# Altium PCB Bucaneve_single_board.PcbDoc (part 1 of 2)
Units mm, origin at the board's own origin, x right, y up, seen from the top; angles counter-clockwise.
Board outline 64 x 64 mm, 4 copper layers (Top Layer, Mid-Layer 1, Mid-Layer 2, Bottom Layer), stack 2.772 mm thick; 84 components, 52 nets, 236 pads, 132 vias.
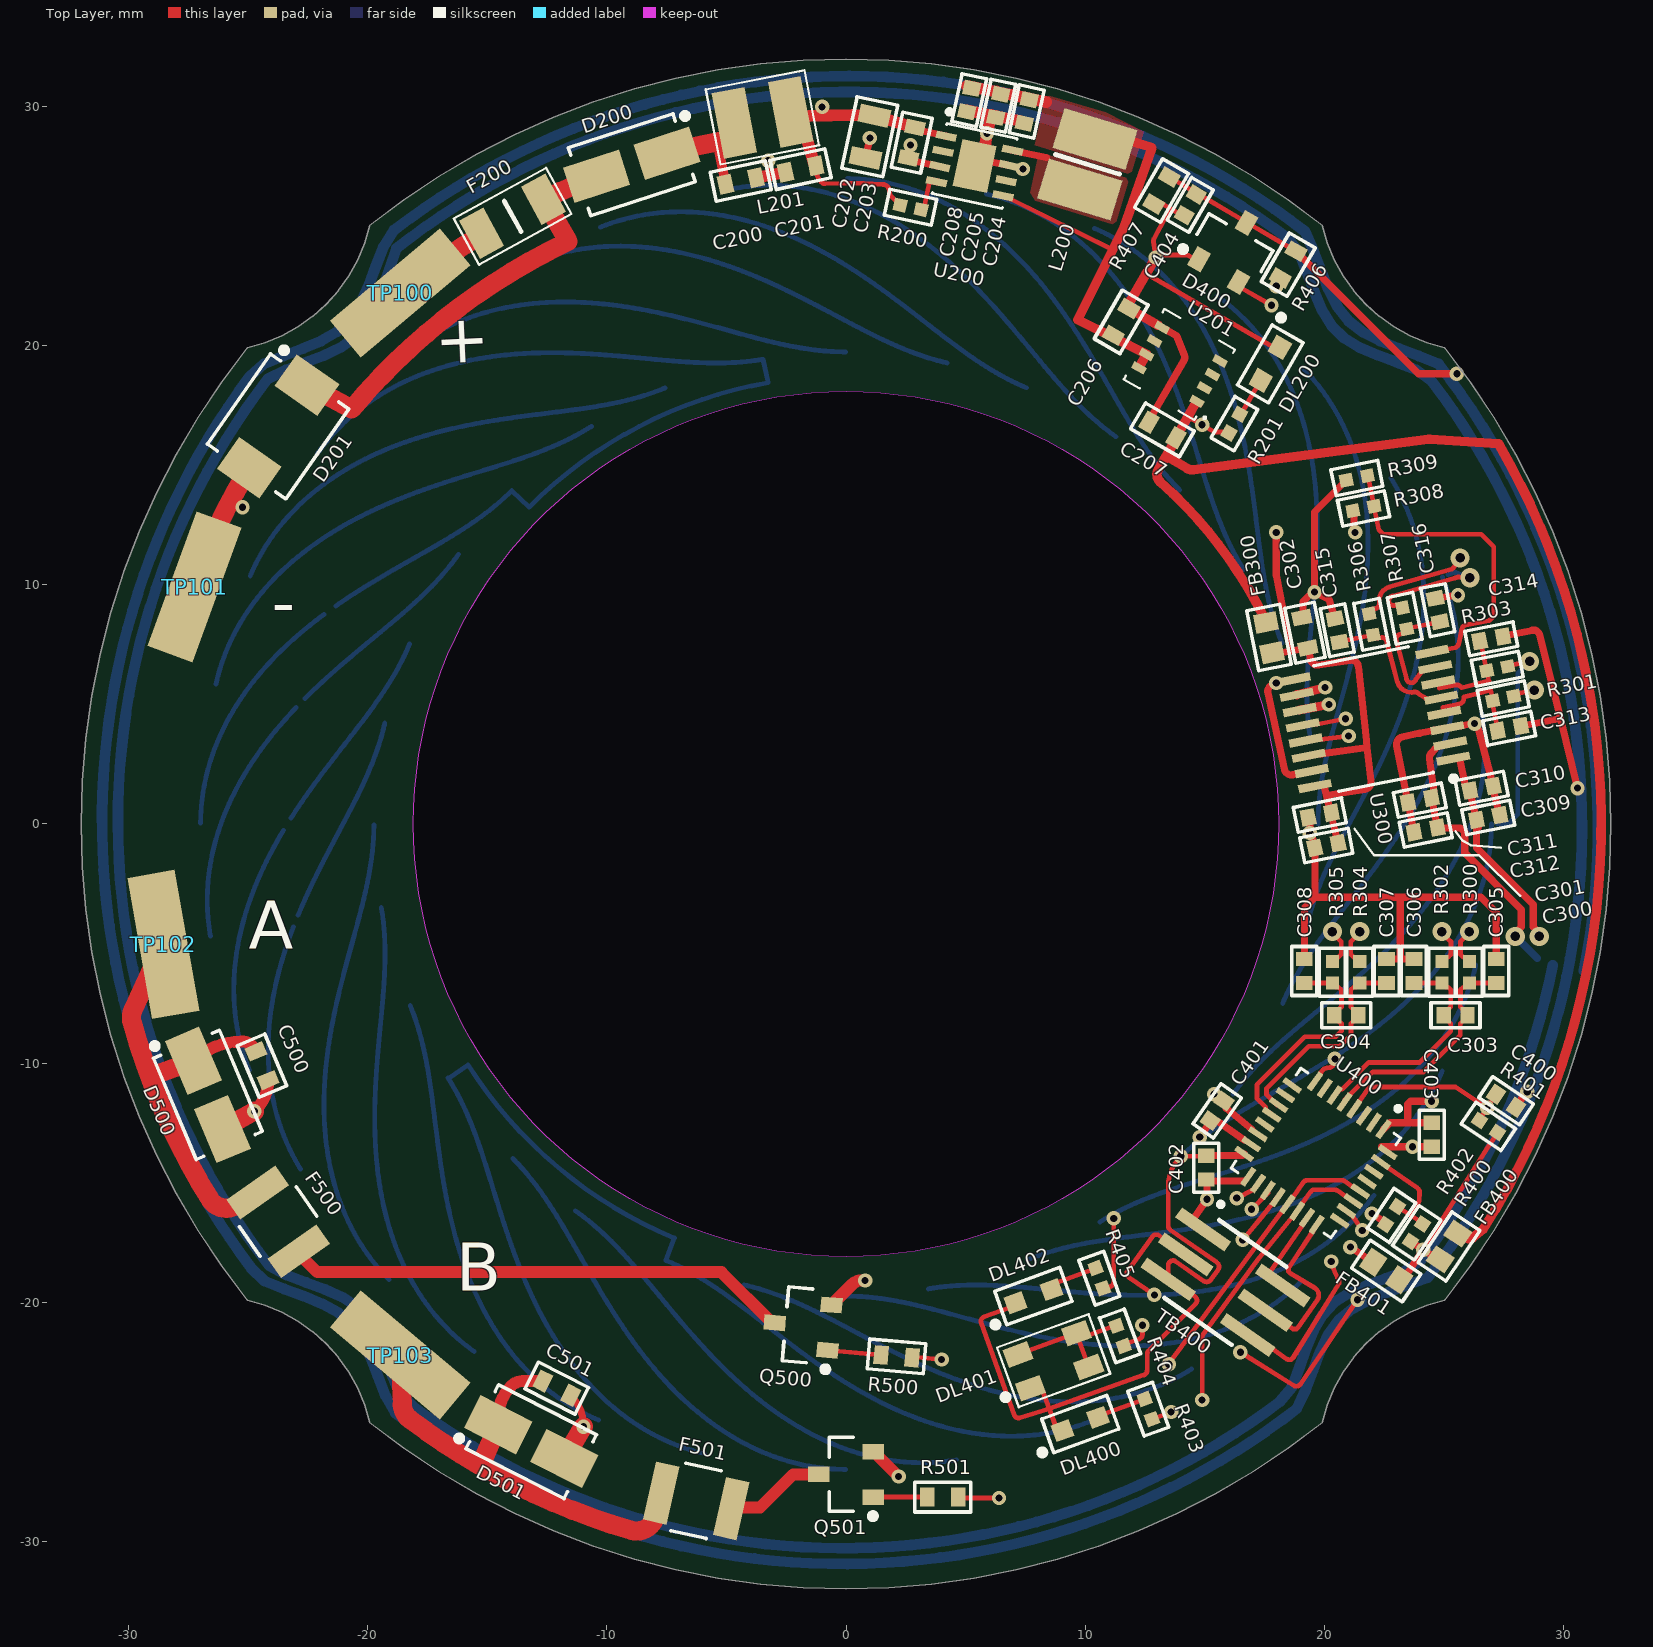
[diagram p0: Top Layer view]
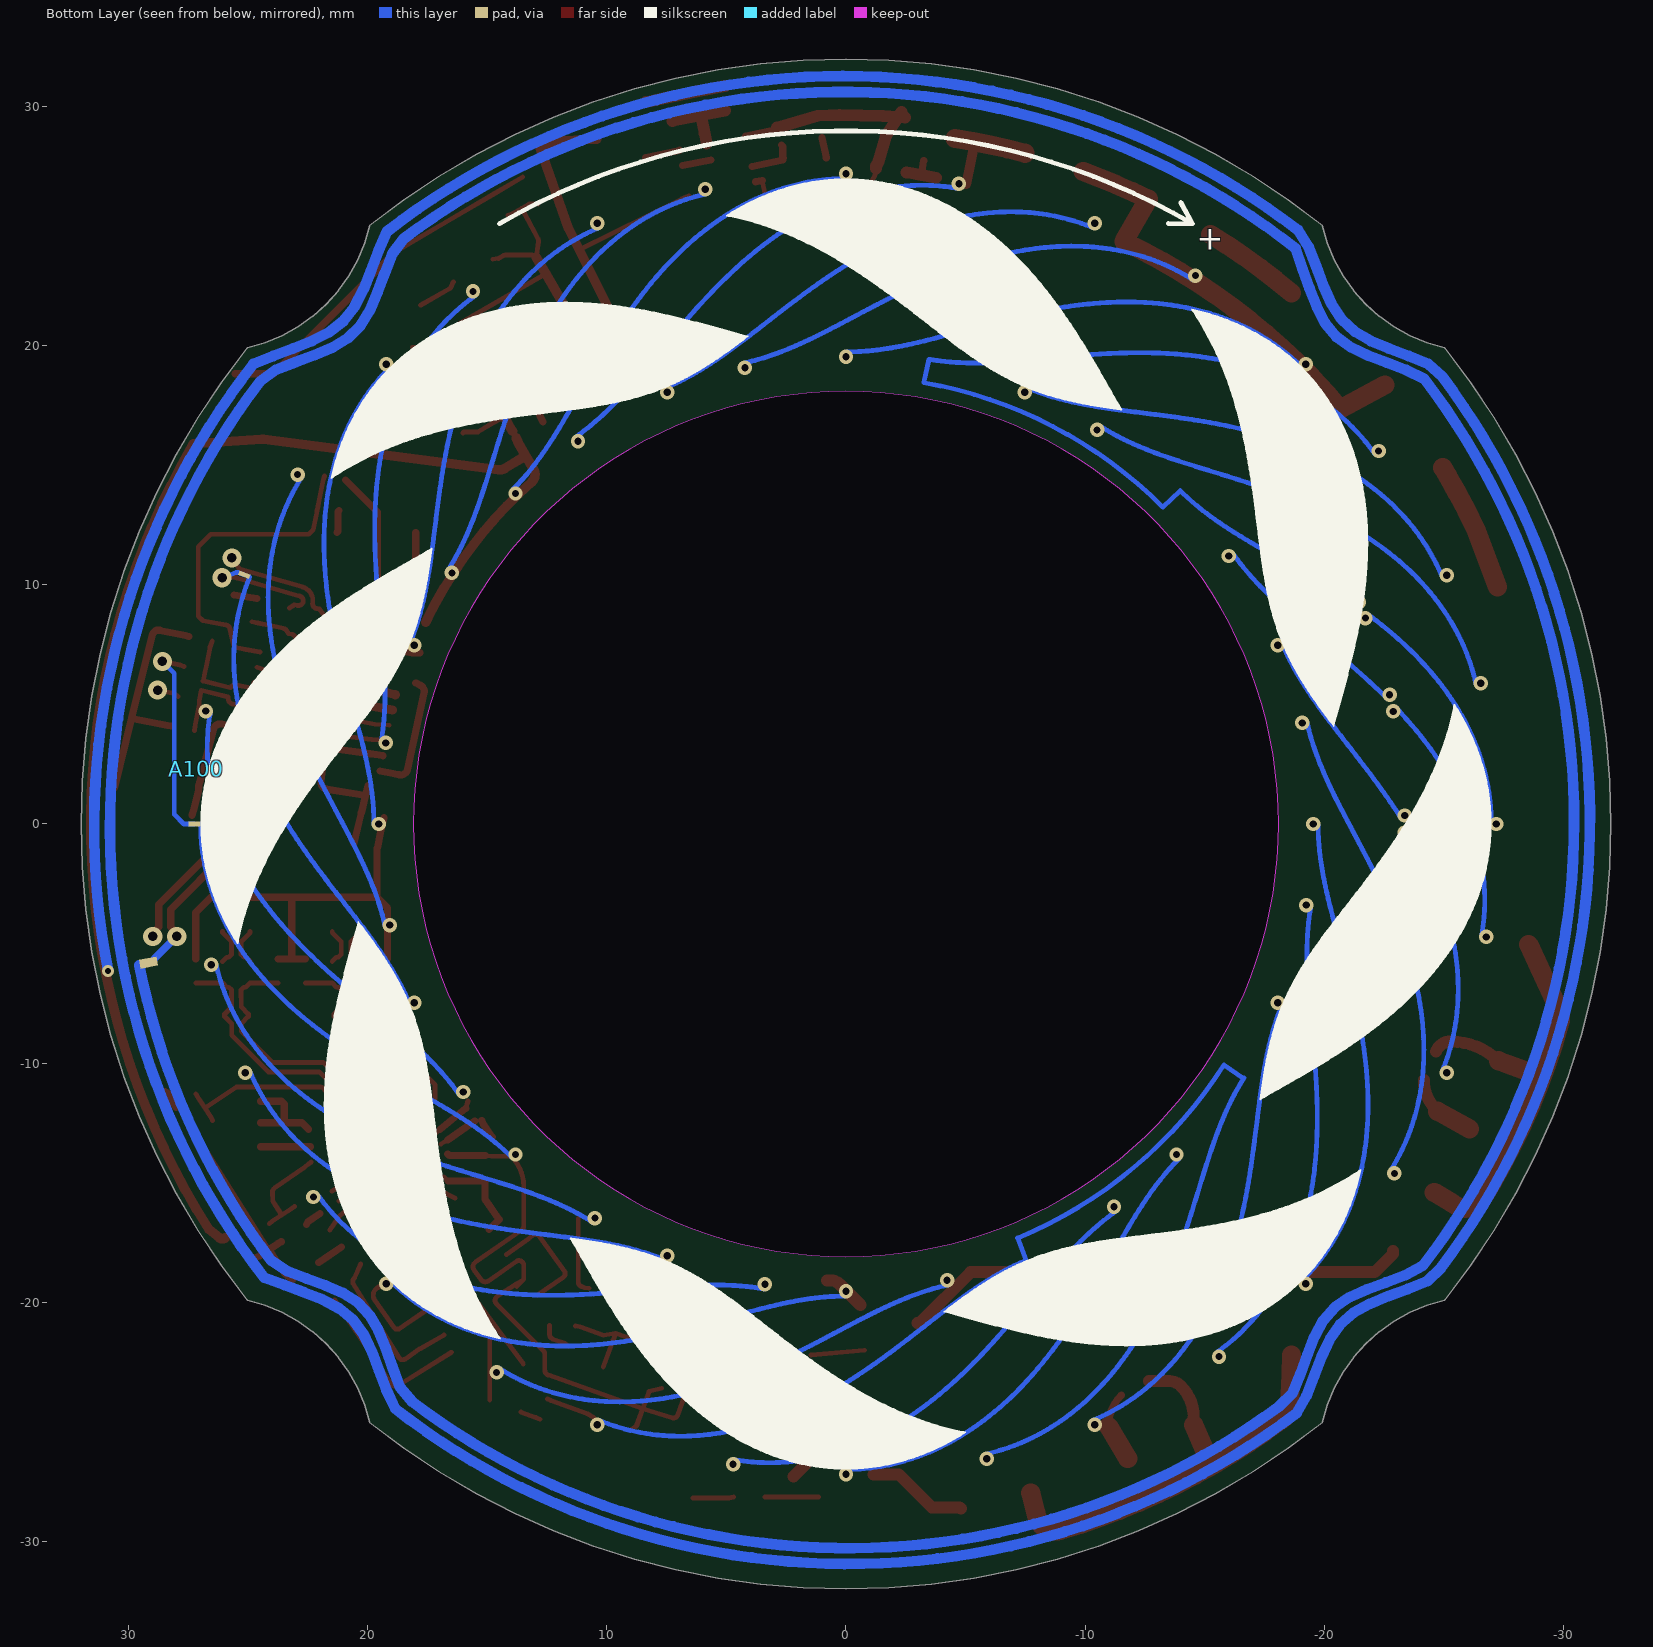
[diagram p1: Bottom Layer view, seen from below]
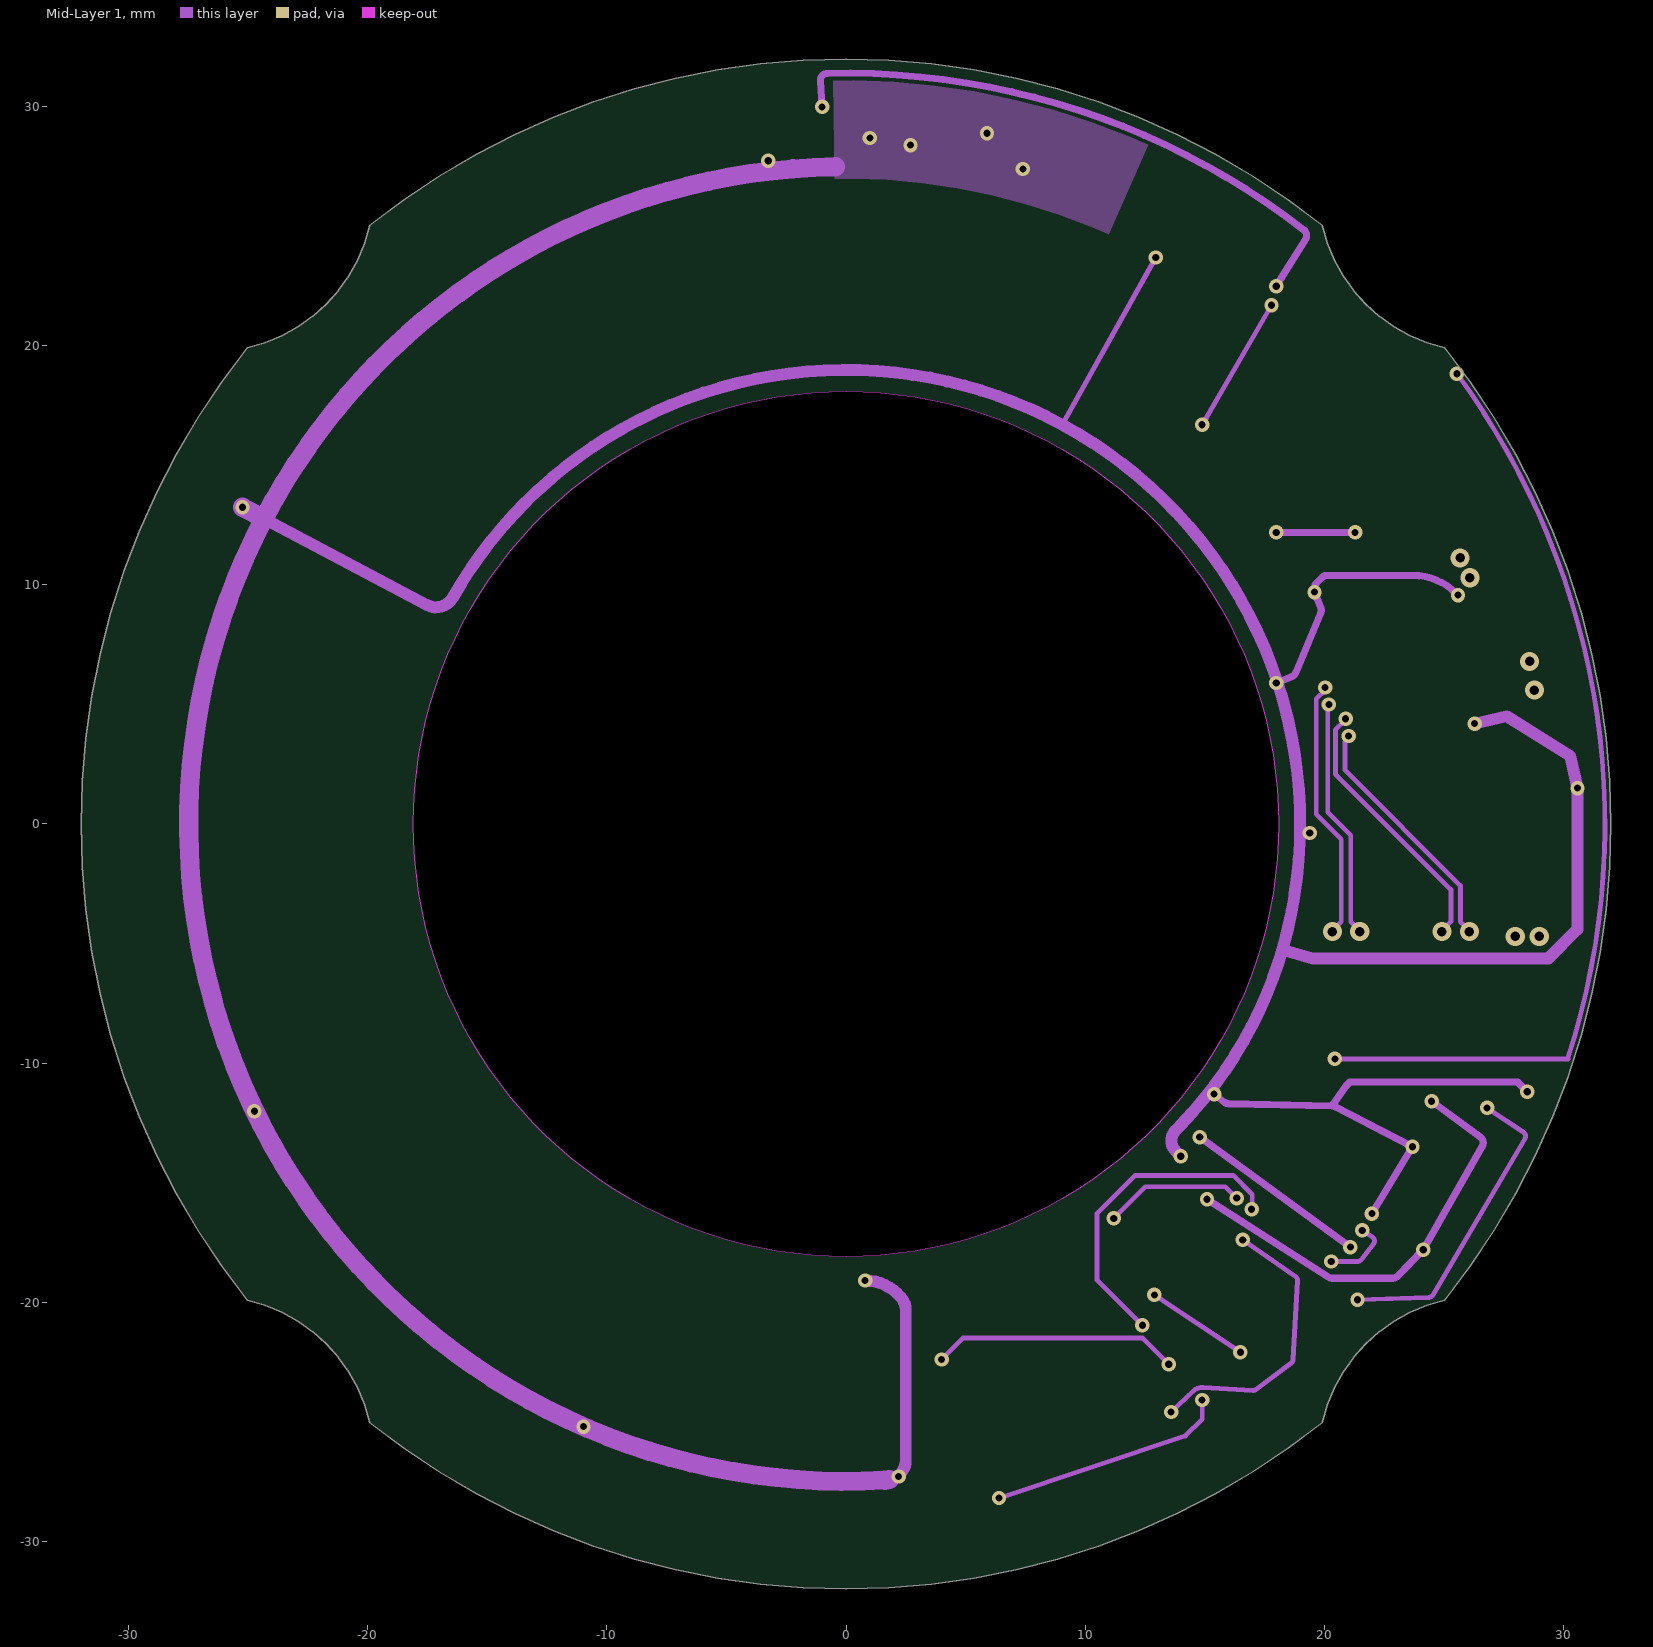
[diagram p2: Mid-Layer 1]
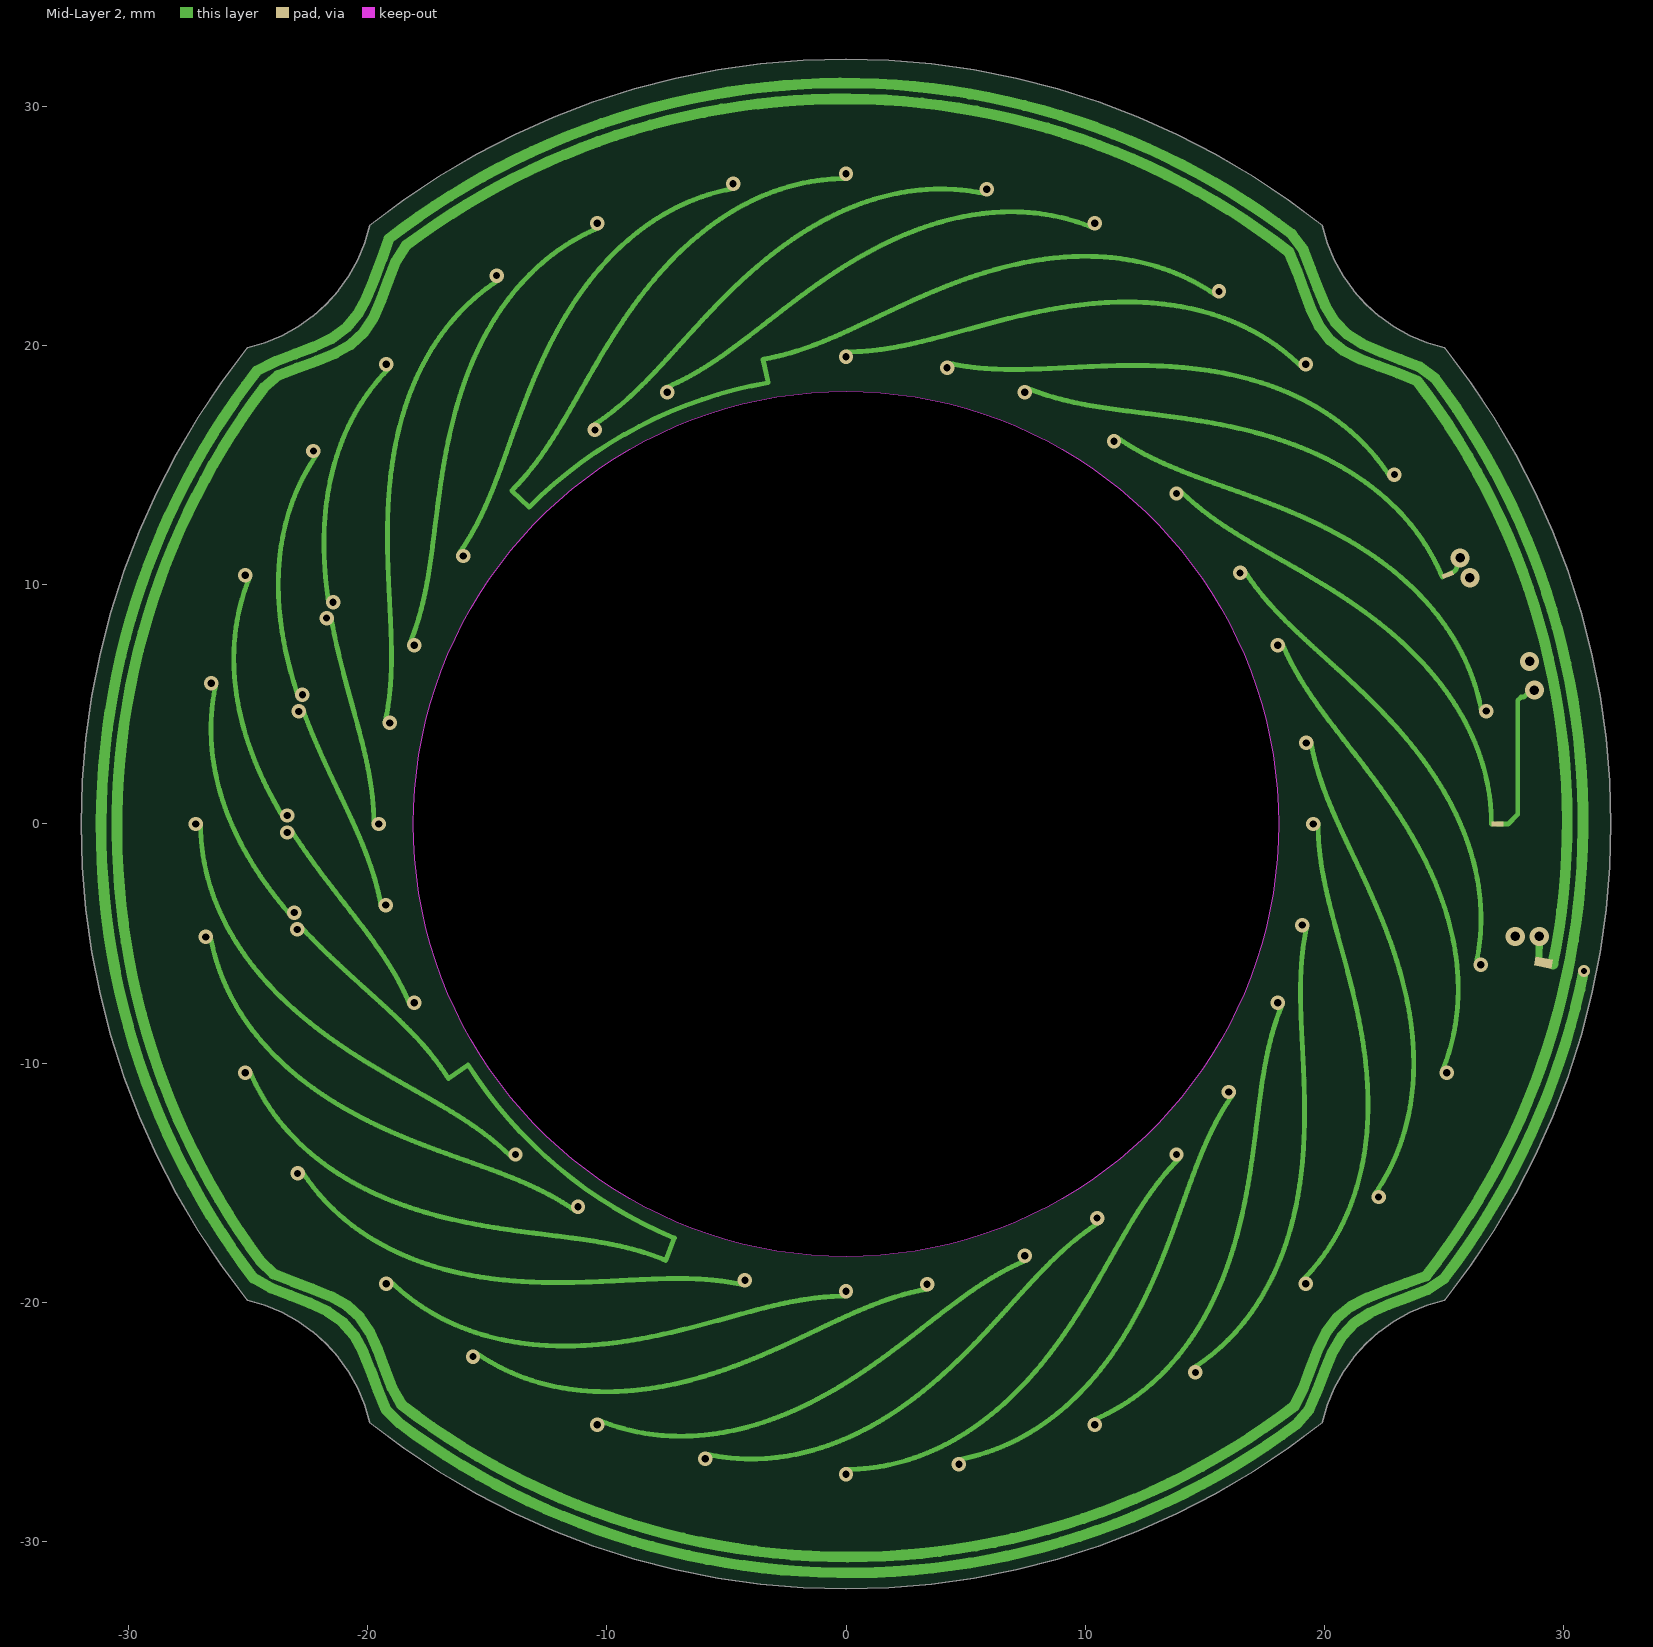
[diagram p3: Mid-Layer 2]

## Layer stack, top to bottom
Top Solder: solder mask 0.0102, Solder Resist, Dk 3.5
Top Layer: signal copper 0.0356
Dielectric 1: dielectric 0.115, FR-4, Dk 4.8
Mid-Layer 1: signal copper 0.035
Dielectric 2: prepreg 2.4, PP-006, Dk 4.1
Mid-Layer 2: signal copper 0.0356
Dielectric2: dielectric 0.115, FR-4, Dk 4.8
Bottom Layer: signal copper 0.0356
Bottom Solder: solder mask 0.0102, Solder Resist, Dk 3.5

## Board outline
-25.035,-19.931 -26.112,-18.498 -27.107,-17.006 -28.017,-15.462 -28.839,-13.868 -29.57,-12.232 -30.209,-10.557 -30.752,-8.848 -31.2,-7.112 -31.549,-5.354 -31.799,-3.579 -31.95,-1.792 -32,0 -31.95,1.792 -31.799,3.578 -31.549,5.354 -31.2,7.112 -30.752,8.848 -30.209,10.556 -29.57,12.232 -28.839,13.868 -28.017,15.462 -27.107,17.006 -26.112,18.498 -25.035,19.931 -24.303,20.14 -23.599,20.429 -22.932,20.797 -22.311,21.237 -21.744,21.744 -21.237,22.311 -20.797,22.932 -20.43,23.599 -20.14,24.303 -19.931,25.035 -18.498,26.112 -17.006,27.107 -15.462,28.017 -13.868,28.839 -12.232,29.57 -10.557,30.209 -8.848,30.752 -7.112,31.2 -5.354,31.549 -3.579,31.799 -1.792,31.95 0,32 1.792,31.95 3.578,31.799 5.354,31.549 7.112,31.2 8.848,30.752 10.556,30.209 12.232,29.57 13.868,28.839 15.462,28.017 17.006,27.107 18.498,26.112 19.931,25.035 20.14,24.303 20.429,23.599 20.797,22.932 21.237,22.311 21.744,21.744 22.311,21.237 22.932,20.797 23.599,20.429 24.303,20.14 25.035,19.931 26.112,18.498 27.107,17.006 28.017,15.462 28.839,13.868 29.57,12.232 30.209,10.556 30.752,8.848 31.2,7.112 31.549,5.354 31.799,3.578 31.95,1.792 32,0 31.95,-1.792 31.799,-3.579 31.549,-5.354 31.2,-7.112 30.752,-8.848 30.209,-10.557 29.57,-12.232 28.839,-13.868 28.017,-15.462 27.107,-17.006 26.112,-18.498 25.035,-19.931 24.303,-20.14 23.599,-20.43 22.932,-20.797 22.311,-21.237 21.744,-21.744 21.237,-22.311 20.797,-22.932 20.429,-23.599 20.14,-24.303 19.931,-25.035 18.498,-26.112 17.006,-27.107 15.462,-28.017 13.868,-28.839 12.232,-29.57 10.556,-30.209 8.848,-30.752 7.112,-31.2 5.354,-31.549 3.578,-31.799 1.792,-31.95 0,-32 -1.792,-31.95 -3.579,-31.799 -5.354,-31.549 -7.112,-31.2 -8.848,-30.752 -10.557,-30.209 -12.232,-29.57 -13.868,-28.839 -15.462,-28.017 -17.006,-27.107 -18.498,-26.112 -19.931,-25.035 -20.14,-24.303 -20.43,-23.599 -20.797,-22.932 -21.237,-22.311 -21.744,-21.744 -22.311,-21.237 -22.932,-20.797 -23.599,-20.43 -24.303,-20.14
cut-out: 0,-18.1 cw(c0,0) -18.1,0 cw(c0,0) 0,18.1 cw(c0,0) 18.1,0 cw(c0,0)

## Design rules (kind name [scope] priority, off if disabled: settings)
Clearance Clearance_1 [InNet('TX_P') vs InNet('TX_N')] p1: gap=0 ignorepadtopadclearanceinfootprint=TRUE
Clearance Clearance_2 [InNet('RX_SIN_N') vs InNet('RX_SIN_P')] p2: gap=0 ignorepadtopadclearanceinfootprint=TRUE
Clearance Clearance_3 [InNet('RX_COS_N') vs InNet('RX_COS_P')] p3: gap=0 ignorepadtopadclearanceinfootprint=TRUE
Clearance [All] p4: gap=0.127 ignorepadtopadclearanceinfootprint=TRUE
ComponentClearance [All] p1: gap=0.254 collisioncheckmode=3 verticalgap=0.254 showdistances=FALSE donotcheckwithout3dbody=TRUE
DiffPairsRouting [All] p1: maxlimit=0.5 minlimit=0.2 mostfreqgap=0.3 toplayer_minwidth=0.2 toplayer_maxwidth=0.5 toplayer_prefwidth=0.2 midlayer1_minwidth=0.2 midlayer1_maxwidth=0.5 midlayer1_prefwidth=0.2 midlayer2_minwidth=0.2 midlayer2_maxwidth=0.5 midlayer2_prefwidth=0.2 bottomlayer_minwidth=0.2 bottomlayer_maxwidth=0.5 bottomlayer_prefwidth=0.2 maxuncoupledlength=12.7
MinimumSolderMaskSliver [All] p1: minsoldermaskwidth=0.127
PolygonConnect [All] p1: thpad.connectstyle=Relief thpad.reliefconductorwidth=0.254 thpad.reliefentries=4 thpad.polygonreliefangle="90 Angle" thpad.airgapwidth=0.254 smdpad.connectstyle=Relief smdpad.reliefconductorwidth=0.254 smdpad.reliefentries=4 smdpad.polygonreliefangle="90 Angle" smdpad.airgapwidth=0.254 via.connectstyle=Direct via.reliefconductorwidth=0.254 via.reliefentries=4 via.polygonreliefangle="90 Angle" via.airgapwidth=0.254
RoutingVias [All] p1: holewidth=1 width=0.6 viastyle="Through Hole" minholewidth=0.25 minwidth=0.5 maxholewidth=0.7 maxwidth=1
ShortCircuit ShortCircuit_1 [InNet('TX_N') vs InNet('TX_P')] p1: allowed=TRUE
ShortCircuit ShortCircuit_2 [InNet('RX_SIN_N') vs InNet('RX_SIN_P')] p2: allowed=TRUE
ShortCircuit ShortCircuit_3 [InNet('RX_COS_N') vs InNet('RX_COS_P')] p3: allowed=TRUE
ShortCircuit [All] p4: allowed=FALSE
SilkToSilkClearance [All] p1: silktosilkclearance=0.127
SilkToSolderMaskClearance [IsPad] p1: minsilkscreentomaskgap=0.065 clearancetoexposedcopper=TRUE
SolderMaskExpansion [All] p1: expansion=0 istentingtop=FALSE
SupplyNets "Schematic Supply Nets_7" [InNet('Buck_Vin')] p1: voltage=0.000
SupplyNets "Schematic Supply Nets_6" [InNet('3V3_MCU')] p2: voltage=0.000
SupplyNets "Schematic Supply Nets_3" [InNet('VDDA_MCU')] p3: voltage=0.000
SupplyNets "Schematic Supply Nets_5" [InNet('3V3_LDC')] p4: voltage=0.000
SupplyNets "Schematic Supply Nets_4" [InNet('3V3')] p5: voltage=0.000
SupplyNets "Schematic Supply Nets_2" [InNet('GND')] p6: voltage=0.000
SupplyNets "Schematic Supply Nets_1" [InNet('V_SUPPLY')] p7: voltage=0.000
SupplyNets "Schematic Supply Nets" [InNet('5V')] p8: voltage=0.000
Width [All] p1: maxlimit=0.8 minlimit=0.2 preferedwidth=0.3 minimp=50.000000 maximp=50.000000 favimp=50.000000
24 further rules are at their usual default settings.

## Classes and differential pairs
component class PWR: C200 C201 C202 C203 C204 C205 C206 C207 C208 D200 D201 DL200 F200 L200 L201 R200 R201 U200 U201
component class OUT_DRV: C500 C501 D500 D501 F500 F501 Q500 Q501 R500 R501
component class MCU: C400 C401 C402 C403 C404 D400 DL400 DL401 DL402 FB400 FB401 R400 R401 R402 R403 R404 R405 R406 R407 TB400 U400
component class COIL_IF: C300 C301 C302 C303 C304 C305 C306 C307 C308 C309 C310 C311 C312 C313 C314 C315 C316 FB300 R300 R301 R302 R303 R304 R305 R306 R307 R308 R309 U300
component class Bucaneve_single_board: A100 TP100 TP101 TP102 TP103
differential pair TX: +TX_P -TX_N
differential pair SIN_FILT: +SIN_FILT_P -SIN_FILT_N
differential pair SIN: +SIN_P -SIN_N
differential pair RX_SIN_FILT: +RX_SIN_FILT_P -RX_SIN_FILT_N
differential pair RX_SIN: +RX_SIN_P -RX_SIN_N
differential pair RX_COS_FILT: +RX_COS_FILT_P -RX_COS_FILT_N
differential pair RX_COS: +RX_COS_P -RX_COS_N
differential pair COS_FILT: +COS_FILT_P -COS_FILT_N
differential pair COS: +COS_P -COS_N

## Components (designator, comment, footprint, x,y, rotation, side; value= is the part's Value field where it differs from the comment)
A100 "IPS_4PP_2PH_1T_2L" IPS_4PP_2PH_2T_2L4_4TX045_EXT 0,0 r0 top locked value=IPS_4PP_2PH_2T_2L
C200 "100nF" CER0603 -4.4,26.9 r12 top
C201 "100nF" CER0603 -1.9,27.4 r192 top
C202 "1uF" CER0805 1,28.75 r258 top
C203 "100nF" CER0603 2.75,28.5 r258 top
C204 "100nF" CER0402 7.557,29.808 r258 top
C205 "1uF" CER0402 6.368,30.046 r258 top
C206 "2.2uF" CER0603 11.514,21.006 r60 top
C207 "2.2uF" CER0603 13.237,16.49 r150 top
C208 "1uF" CER0402 5.154,30.283 r258 top
C300 "100nF" CER0402 20.1,-0.9 r191.25 top
C301 "10nF" CER0402 19.825,0.375 r191.25 top
C302 "1uF" CER0603 19.2,8 r101.25 top
C303 "100nF" CER0402 25.5,-8 r0 top
C304 "100nF" CER0402 20.925,-8 r0 top
C305 "1nF" CER0402 27.2,-6.15 r90 top
C306 "1nF" CER0402 23.761,-6.15 r90 top
C307 "1nF" CER0402 22.614,-6.15 r90 top
C308 "1nF" CER0402 19.175,-6.15 r90 top
C309 "1.5nF" CER0402 26.864,0.271 r11.25 top
C310 "1.5nF" CER0402 26.589,1.496 r11.25 top
C311 "1.5nF" CER0402 24,1 r191.25 top
C312 "1.5nF" CER0402 24.25,-0.25 r191.25 top
C313 "470pF" CER0402 27.75,4 r11.25 top
C314 "470pF" CER0402 27,7.75 r11.25 top
C315 "470pF" CER0402 20.55,8.1 r101.25 top
C316 "470pF" CER0402 24.75,8.95 r101.25 top
C400 "100nF" CER0402 27.616,-11.578 r326.25 top
C401 "100nF" CER0402 15.525,-12 r55 top
C402 "100nF" CER0402 15.075,-14.375 r90 top
C403 "100nF" CER0402 24.5,-13 r270 top
C404 "100nF" CER0402 14.4,25.9 r240 top
C500 "10nF" CER0603 -24.427,-10.112 r293 top
C501 "10nF" CER0603 -12.1,-23.6 r333 top
D200 "Shottky Rect Diode SMD" DO-214AC_SMA -8.961,27.581 r198 top value=RBR1L60ADDTE25
D201 "SMD/PTH TVS Bidirectional Diode" DO-214AA_SMB -23.755,16.634 r235 top value="TVS 33V SMB"
D400 "Double Schottky Diode, SOT23-3 series" SOT95P230X110-3N 16.175,24.15 r60 top value=BAT54S
D500 "SMD/PTH TVS Unidirectional Diode" DO-214AC_SMA -26.695,-11.331 r293 top value="TVS 28V SMA"
D501 "SMD/PTH TVS Unidirectional Diode" DO-214AC_SMA -13.166,-25.839 r333 top value="TVS 28V SMA"
DL200 "Single Color SMD LED" "LED SMD 0603" 17.75,19.25 r240 top value=LEDG
DL400 "Single Color SMD LED" "LED SMD 0603" 9.8,-25.1 r20 top value=LEDR
DL401 "Single Color SMD LED" LED_PLCC-4 8.676,-22.455 r290 top value=LEDY
DL402 "Single Color SMD LED" "LED SMD 0603" 7.837,-19.75 r20 top value=LEDG
F200 "Fuse_PTCRes" FUSC3216X125N -13.949,25.425 r28.75 top value=1206L016WR
F500 "Fuse_PTCRes" PTCC3226X08N -23.755,-16.634 r125 top value=MICROSMD010F-2
F501 "Fuse_PTCRes" PTCC3226X08N -6.277,-28.313 r167.5 top value=MICROSMD010F-2
FB300 "Value" FEB0603 17.7,7.8 r281.25 top
FB400 "Value" FEB0603 25.225,-17.675 r236.25 top
FB401 "Value" FEB0603 22.6,-18.7 r146.25 top
L200 "SMD Inductor" WE-MAPI_1212 10.1,27.6 r73 top value=3.3uH
L201 "SMD Inductor" WE-LQ_1210 -3.494,29.56 r11 top value=4.7uH
Q500 "NPN Transistor SMD" SOT95P230X110-3N -1.835,-20.97 r175 top value=BC847C-Q
Q501 "NPN Transistor SMD" SOT95P230X110-3N 0,-27.206 r180 top value=BC847C-Q
R200 "SMD Resistor" Res0402 2.7,25.8 r168 top value=10K
R201 "SMD Resistor" Res0402 16.25,16.75 r240 top value=249R
R300 "SMD Resistor" Res0402 26.079,-6.2 r270 top value=0R
R301 "SMD Resistor" Res0402 27.5,5.25 r191.25 top value=100R
R302 "SMD Resistor" Res0402 24.932,-6.2 r270 top value=0R
R303 "SMD Resistor" Res0402 27.25,6.5 r191.25 top value=100R
R304 "SMD Resistor" Res0402 21.493,-6.2 r270 top value=0R
R305 "SMD Resistor" Res0402 20.346,-6.2 r270 top value=0R
R306 "SMD Resistor" Res0402 21.97,8.35 r281.25 top value=100R
R307 "SMD Resistor" Res0402 23.37,8.6 r281.25 top value=100R
R308 "SMD Resistor" Res0402 21.65,13.2 r191.25 top value=1K
R309 "SMD Resistor" Res0402 21.375,14.475 r11.25 top value=1K
R400 "SMD Resistor" Res0402 23.875,-17.1 r236.25 top value=10K
R401 "SMD Resistor" Res0402 26.874,-12.65 r326.25 top value=10K
R402 "SMD Resistor" Res0402 22.825,-16.375 r56.25 top value=10K
R403 "SMD Resistor" Res0402 12.646,-24.477 r290 top value=249R
R404 "SMD Resistor" Res0402 11.465,-21.419 r290 top value=249R
R405 "SMD Resistor" Res0402 10.6,-19 r290 top value=249R
R406 "SMD Resistor" Res0603 18.5,23.4 r240 top value=33K
R407 "SMD Resistor" Res0603 13.2,26.5 r60 top value=3K3
R500 "SMD Resistor" Res0603 2.117,-22.269 r175 top value=1k
R501 "SMD Resistor" Res0603 4.05,-28.156 r180 top value=1k
TB400 "TC2030_NL" SAMTEC_FTSH-103_3x2_SMD 15.875,-19.175 r235 top value=FTSH-103-01-L-DV
TP100 "Test Point" TSTPNT_SMD_RECT_2x6 -18.641,22.215 r310 top value=TP_RECT_2x6
TP101 "Test Point" TSTPNT_SMD_RECT_2x6 -27.251,9.919 r340 top value=TP_RECT_2x6
TP102 "Test Point" TSTPNT_SMD_RECT_2x6 -28.559,-5.036 r10 top value=TP_RECT_2x6
TP103 "Test Point" TSTPNT_SMD_RECT_2x6 -18.641,-22.215 r50 top value=TP_RECT_2x6
U200 "ONSEMI_NCV890430" SON65P300X300X100-9N 5.379,27.527 r348 top value=NCV890430
U201 "TI_TPS78533Q_VSON" SON65P300X100_HS-9N_NOPAD 13.95,19.225 r150 top value=TPS78433-Q1
U300 "LDC5072EPWRQ1" TSSOP16-PW_TEX 22.068,4.39 r191.25 top value=LDC5072
U400 "STM32G431K8U6" QFN50P500X500X60-NOPAD 19.66,-13.766 r235 top value=STM32G431

## Footprints (in the part's own frame and the unit in brackets; to place one, negate y for a bottom-side part, rotate by r counter-clockwise, add the part's x,y. Pads: shape width x height; smd on the part's side, far side on the other; paste and mask are expansions set on the pad)
CER0402 [mm] "CAPC1005X04N"
  rect 0.6x0.7 smd: 1(-0.5,0) 2(0.5,0)
  silkscreen extent -1.03,-0.53 1.03,0.53, body extent -0.5,-0.3 0.5,0.3, height 0.19
CER0603 [mm] "CAPC1608X05N"
  rect 0.6x0.8 smd: 1(-0.65,0) 2(0.65,0)
  silkscreen extent -1.17,-0.63 1.17,0.63, body extent -0.8,-0.4 0.8,0.4, height 0.29
CER0805 [mm]
  rect 0.76x1.3 smd: 1(-0.9,0) 2(0.9,0)
  silkscreen extent -1.53,-0.88 1.52,0.87, body extent -1,-0.62 1,0.63, height 0.77
DO-214AA_SMB [mm] "DIOM4336X25N Molded Diode, 2-Leads, Body 4,32x3,63mm, IPC Medium Density"
  rect 1.62x2.18 smd: 1(-2.11,0) 2(2.11,0)
  silkscreen extent -2.87,-2 2.3,2, body extent -2.79,-1.97 2.79,1.97, height 2.64
DO-214AC_SMA [mm] "Molded Diode, 2-Leads, Body 4,30x2,60mm, IPC Medium Density"
  rect 2.45x1.55 smd: 1(-1.55,0) 2(1.55,0)
  silkscreen extent -2.87,-1.5 2.3,1.5, body extent -2.75,-1.4 2.75,1.4, height 2.6
FEB0603 [mm] "FEBC1608X05N"
  rect 0.8x0.95 smd: 1(-0.65,0) 2(0.65,0)
  silkscreen extent -1.28,-0.7 1.28,0.7, body extent -0.8,-0.4 0.8,0.4, height 0.79
FUSC3216X125N [mm]
  rect 1.16x1.82 smd: 1(-1.475,0) 2(1.475,0)
  silkscreen extent -2.2,-1.1 2.2,1.1, body extent -1.6,-0.83 1.6,0.83, height 1.45
IPS_4PP_2PH_2T_2L4_4TX045_EXT [mm] "Inductive position sensor, 2 phase, 2 turns RX, 4Layers 4 Pole pairs, 4 turns TX trace width 0.45mm"
  rect 0.4x0.75 on Mid2 rot 78.75 paste-2539.97 mask+0: 1(29.178,-5.804)
  rect 0.4x0.75 smd far side rot 78.75 paste-2539.97 mask+0: 2(29.178,-5.804)
  rect 0.5x0.2 on Mid2 paste-2539.97 mask+0: 3(27.25,0)
  rect 0.5x0.2 smd far side paste-2539.97 mask+0: 4(27.25,0)
  rect 0.2x0.5 on Mid2 rot 112.5 paste-2539.97 mask+0: 5(25.176,10.428)
  rect 0.2x0.5 smd far side rot 112.5 paste-2539.97 mask+0: 6(25.176,10.428)
  Mid-Layer 2 drawing of 8444 lines, arcs and shapes, not listed
  Bottom Layer drawing of 8445 lines, arcs and shapes, not listed
"LED SMD 0603" [mm] "LED 0603(1.6x0.8mm)"
  rect 0.8x0.75 smd: 1(-0.8,0) 2(0.8,0)
  silkscreen extent -2.02,-0.75 1.45,0.75, body extent -0.85,-0.45 0.85,0.45, height 0.9
LED_PLCC-4 [mm] "LED PLCC 4 pin single color round"
  rect 0.8x1.1 smd: 1(0.75,-1.3) 2(-0.75,1.3) 2(-0.75,-1.3) 2(0.75,1.3)
  silkscreen extent -1.33,-2.52 1.33,2.05, body extent -1.4,-1.75 1.4,1.75, height 3.4
PTCC3226X08N [mm] "Chip PTC, 2-Leads, Body 3,22x2,57mm, IPC Medium Density  (microSMDxxx Littlefuse)"
  rect 1x2.5 smd: 1(-1.51,0) 2(1.49,0)
  silkscreen extent -0.75,-1.45 0.75,1.45, body extent -1.62,-1.29 1.6,1.29, height 0.67
QFN50P500X500X60-NOPAD [mm]
  rrect25% 0.86x0.25 smd: 1(-2.435,1.75) 2(-2.435,1.25) 3(-2.435,0.75) 4(-2.435,0.25) 5(-2.435,-0.25) 6(-2.435,-0.75) 7(-2.435,-1.25) 8(-2.435,-1.75) 17(2.435,-1.75) 18(2.435,-1.25) 19(2.435,-0.75) 20(2.435,-0.25) 21(2.435,0.25) 22(2.435,0.75) 23(2.435,1.25) 24(2.435,1.75)
  rrect25% 0.25x0.86 smd: 9(-1.75,-2.435) 10(-1.25,-2.435) 11(-0.75,-2.435) 12(-0.25,-2.435) 13(0.25,-2.435) 14(0.75,-2.435) 15(1.25,-2.435) 16(1.75,-2.435) 25(1.75,2.435) 26(1.25,2.435) 27(0.75,2.435) 28(0.25,2.435) 29(-0.25,2.435) 30(-0.75,2.435) 31(-1.25,2.435) 32(-1.75,2.435)
  rect 0.1x0.1 smd paste-2539.97: 33(-1.8,2.1)
  silkscreen extent -3.59,-2.55 2.55,2.55, body extent -2.5,-2.5 2.5,2.5, height 0.6
Res0402 [mm] "RESC1005X04N"
  rect 0.55x0.55 smd: 1(-0.45,0) 2(0.45,0)
  silkscreen extent -1,-0.55 1,0.55, body extent -0.5,-0.25 0.5,0.25, height 0.34
Res0603 [mm] "RESC1608X05N"
  rect 0.6x0.8 smd: 1(-0.65,0) 2(0.65,0)
  silkscreen extent -1.17,-0.63 1.17,0.63, body extent -0.8,-0.4 0.8,0.4, height 0.44
SAMTEC_FTSH-103_3x2_SMD [mm]
  rect 0.5x2.5 smd: 1(-1.27,-2.035) 2(-1.27,2.035) 3(0,-2.035) 4(0,2.035) 5(1.27,-2.035) 6(1.27,2.035)
  silkscreen extent -2.65,-2.13 1.99,1.72, body extent -1.9,-2.92 1.9,2.92, height 5.96
SON65P300X100_HS-9N_NOPAD [mm] "SON, 8-Leads, Body 3,00x3,00mm, Pitch 0,65mm, Thermal Pad 2,37x1,60mm, IPC Medium Density"
  rect 0.6x0.32 smd: 1(-1.4,0.975) 2(-1.4,0.325) 3(-1.4,-0.325) 4(-1.4,-0.975) 5(1.4,-0.975) 6(1.4,-0.325) 7(1.4,0.325) 8(1.4,0.975)
  rect 0.1x0.1 smd paste-2539.97: 9(1.25,-1)
  silkscreen extent -2.07,-1.7 1.7,1.7, body extent -1.49,-1.49 1.51,1.51, height 1
SON65P300X300X100-9N [mm]
  rrect5% 0.87x0.32 smd paste+0 mask+0: 1(-1.42,0.975) 2(-1.42,0.325) 3(-1.42,-0.325) 4(-1.42,-0.975) 5(1.42,-0.975) 6(1.42,-0.325) 7(1.42,0.325) 8(1.42,0.975)
  rect 1.47x2 smd paste-2 mask+0.05: 9(0,0)
  silkscreen extent -1.6,-1.5 1.5,2.1, body extent -1.5,-1.5 1.5,1.5, height 1
SOT95P230X110-3N [mm] "SOT23-3"
  rect 0.9x0.65 smd: 1(-1.15,0.95) 2(-1.15,-0.95) 3(1.15,0)
  silkscreen extent -1.25,-1.55 0.7,1.87, body extent -1.5,-1.5 1.5,1.5, height 1.3
TSSOP16-PW_TEX [mm]
  rect 1.404x0.355 smd paste+0 mask+0: 1(-2.95,2.275) 2(-2.95,1.625) 3(-2.95,0.975) 4(-2.95,0.325) 5(-2.95,-0.325) 6(-2.95,-0.975) 7(-2.95,-1.625) 8(-2.95,-2.275) 9(2.95,-2.275) 10(2.95,-1.625) 11(2.95,-0.975) 12(2.95,-0.325) 13(2.95,0.325) 14(2.95,0.975) 15(2.95,1.625) 16(2.95,2.275)
  silkscreen extent -2.9,-2.68 2,3.2, body extent -3.3,-2.55 3.3,2.55, height 1.2
TSTPNT_SMD_RECT_2x6 [mm] "Test Point, SMD rectangular 2x6 mm"
  rect 2x6 smd: 1(0,0)
WE-LQ_1210 [mm] "SMT Inductor, body 3.2x2.5mm"
  rect 1.4x2.8 smd: 1(-1.2,0) 2(1.2,0)
  silkscreen extent -2.1,-1.6 2.1,1.6, body extent -1.6,-1.25 1.6,1.25, height 1.99
WE-MAPI_1212 [mm]
  rect 1.75x3.2 smd: 1(-1.1,0) 2(1.1,0)
  silkscreen extent 0,-1.4 0,1.4, body extent -1.5,-1.5 1.5,1.5, height 1

## Part data
A100: library part IPS_4PP_2PH_2T_2L4_4TX045_EXT, "Inductive position sensor, 2 phase, 2 turn, 2Layers 4 Pole pairs", Ext Diameter=63mm, Int Diameter=39.5mm, MFG1=PMP, MPN1=IPS_4PP_2PH_2T_2L4_4TX045_EXT
C200 C201 C203: library part GCM188L81H104KA57D, "MLCC Automotive, 100nF, 0603, 50V, 10%, X8L", Case/Package=0603, Dielectric=X8L, Max Op# temp °C=150, Min Op# Temp °C=-55, MPN2=GCJ188L8EL104KA07, Op Voltage=50V, Supplier Part Number=81-GCM188L81H104KA7D, Tolerance=10%, Datasheet URL=https://www.mouser.it/datasheet/2/281/1/GCM188L81H104KA57_01A-3144042.pdf, MFG1=MURATA, MFG2=MURATA, MPN1=GCM188L81H104KA57D, Qualification=AEC-Q200, Supplier=Mouser, Supplier URL=https://www.mouser.it/ProductDetail/Murata-Electronics/GCM188L81H104KA57J?qs=yTuLhIm%2Fv1CdnQNNqnCjYQ%3D%3D, Technology="Powertrain/Safety for Automotive", Termination="Soft (GCJ)"
C202: library part KAM21KR71H105KL, "MLCC Automotive, 1uF, 0805, 50V, 10%, X7R", Case/Package=0805, Dielectric=X7R, Max Op# temp °C=125, Min Op# Temp °C=-55, Op Voltage=50V, Supplier Part Number=581-KAM21KR71H105KL, Tolerance=10%, Datasheet URL=https://www.mouser.it/datasheet/2/40/AutoMLCC-2952695.pdf, MFG1=KYOCERA-AVX, MPN1=KAM21KR71H105KL, Qualification=AEC-Q200, Supplier=Mouser, Supplier URL=https://www.mouser.it/ProductDetail/KYOCERA-AVX/08055C105K4T4A?qs=byeeYqUIh0Oh891bMlItEA%3D%3D, Technology="Powertrain/Safety for Automotive"
C204 C300 C303 C304 C400 C401 C402 C403 C404: library part GCM155R71H104KE02D, "MLCC Automotive, 100nF, 0402, 50V, 10%, X7r", Case/Package=0402, Dielectric=X7R, Max Op# temp °C=125, Min Op# Temp °C=-55, MPN2=GCM155R71H104KE37, Op Voltage=50V, Supplier Part Number=81-GCM155R71H104KE2D, Tolerance=10%, Datasheet URL=https://www.mouser.it/datasheet/2/281/1/GCM155R71H104KE02_01A-3142168.pdf, MFG1=MURATA, MFG2=MURATA, MPN1=GCM155R71H104KE02D, Qualification=AEC-Q200, Supplier=Mouser, Supplier URL=https://www.mouser.it/ProductDetail/Murata-Electronics/GCM155R71H104KE02D?qs=hNud%2FORuBR2sLZsqfoz4Fw%3D%3D, Technology="Powertrain/Safety for Automotive"
C205 C208: library part GCM155C71A105ME38D, "MLCC Automotive, 1uF, 0402, 10V, 20%, X7S", Case/Package=0402, Dielectric=X7S, Max Op# temp °C=125, Min Op# Temp °C=-55, Op Voltage=10V, Supplier Part Number=81-GCM155C71A105ME8D, Tolerance=20.00%, Datasheet URL=https://pim.murata.com/asset/pim4/ceramicCapacitorSMD/GCM155C71A105ME38-01A-EN_PDF_CERAMICCAPACITORSMD, MFG1=MURATA, MPN1=GCM155C71A105ME38D, Qualification=AEC-Q200, Supplier=Mouser, Supplier URL=https://www.mouser.it/it/ProductDetail/Murata-Electronics/GCM155C71A105ME38D?qs=sGAEpiMZZMvsSlwiRhF8qiE2qjJvMbsZOkfRw1uqIZmZq%252BZnnVO3gA%3D%3D
C206 C207: library part GRT188C71C225KE13D, "MLCC Automotive, 2.2uF, 0603, 16V, 10%, X7S", Case/Package=0603, Dielectric=X7S, Max Op# temp °C=125, Min Op# Temp °C=-55, Op Voltage=16V, Supplier Part Number=81-GRT188C71C225KE3D, Tolerance=10%, Datasheet URL=https://www.mouser.it/datasheet/3/76/1/GRT188C71C225KE13_01A.pdf, MFG1=MURATA, MPN1=GRT188C71C225KE13D, Qualification=AEC-Q200, Supplier=Mouser, Supplier URL=https://www.mouser.it/it/ProductDetail/Murata-Electronics/GRT188C71C225KE13D?qs=hd1VzrDQEGhlNcWcmqnE6Q%3D%3D
C301: library part GCM155R71H103KA55*, "MLCC Automotive, 10nF, 0402, 25V, 10%, X7r", Case/Package=0402, Dielectric=X7R, Max Op# temp °C=125, Min Op# Temp °C=-55, Op Voltage=50V, Supplier Part Number=81-GCM155R71H103KA5J, Tolerance=10%, Datasheet URL=https://www.mouser.it/datasheet/2/281/1/GCM155R71H103KA55_01A-3142380.pdf, MFG1=MURATA, MPN1=GCM155R71H103KA55*, Qualification=AEC-Q200, Supplier=Mouser, Supplier URL=https://www.mouser.it/ProductDetail/Murata-Electronics/GCM155R71H103KA55J?qs=N3Kl9KD794RolAwdnyzU1Q%3D%3D, Technology="Powertrain/Safety for Automotive"
C302: library part GCM188R71C105KA64J, "MLCC Automotive, 1uF, 0603, 16V, 10%, X7R", Case/Package=0603, Dielectric=X7R, Max Op# temp °C=125, Min Op# Temp °C=-55, MPN2=C0603C105K4RACAUTO, Op Voltage=16V, Supplier Part Number=81-GCM188R71C105KA4J, Tolerance=10%, Datasheet URL=https://www.mouser.it/datasheet/2/281/1/GCM188R71C105KA64_04A-3143889.pdf, MFG1=MURATA, MFG2=KEMET, MPN1=GCM188R71C105KA64J, Qualification=AEC-Q200, Supplier=Mouser, Supplier URL=https://www.mouser.it/ProductDetail/Murata-Electronics/GCM188R71C105KA64J?qs=4%252BGqC78dy0BN5WaW5TLgXw%3D%3D, Technology="Powertrain/Safety for Automotive"
C305 C306 C307 C308: library part GRT1555C1E102JA02J, "MLCC Automotive, 1nF, 0402, 25V, 10%, COG", Case/Package=0402, Dielectric=C0G, Max Op# temp °C=125, Min Op# Temp °C=-55, Op Voltage=25V, Supplier Part Number=81-GRT1555C1E102JA2J, Tolerance=5%, Datasheet URL=https://www.mouser.it/datasheet/3/76/4/GRT1555C1E102JA02_01A.pdf, MFG1=MURATA, MPN1=GRT1555C1E102JA02J, Qualification=AEC-Q200, Supplier=Mouser, Supplier URL=https://www.mouser.it/it/ProductDetail/Murata-Electronics/GRT1555C1E102JA02J?qs=sGAEpiMZZMvsSlwiRhF8qtsGU%2FCnaNeQokeRzBpVly3nnJVQ2ndM9w%3D%3D
C309 C310 C311 C312: library part C0402C152J5GECAUTO, "MLCC Automotive, 1.5nF, 0402, 50V, 5%, COG", Case/Package=0402, Dielectric=COG, Max Op# temp °C=125, Min Op# Temp °C=-55, Op Voltage=50V, Supplier Part Number=80-C0402C152J5GECAUT, Tolerance=5%, MFG1=KEMET, MPN1=C0402C152J5GECAUTO, Qualification=AEC-Q200, Supplier=Mouser, Supplier URL=https://www.mouser.it/it/ProductDetail/KEMET/C0402C152J5GECAUTO?qs=sGAEpiMZZMvsSlwiRhF8qtsBU8Zhqm2RstfWlm%252B2k5Aa%2FmzJukmmdw%3D%3D
C313 C314 C315 C316: library part GCM1555C1H471JA16, "MLCC Automotive, 470pF, 0402, 50V, 5%, COG", Case/Package=0402, Dielectric=COG, Max Op# temp °C=125, Min Op# Temp °C=-55, Op Voltage=50V, Supplier Part Number=81-GCM1555C1H471JA6J, Tolerance=5%, MFG1=MURATA, MPN1=GCM1555C1H471JA16, Qualification=AEC-Q200, Supplier=Mouser, Supplier URL=https://www.mouser.it/ProductDetail/Murata-Electronics/GCM1555C1H471JA16J?qs=N3Kl9KD794TXvw4%2Fs7azFA%3D%3D, Technology="Powertrain/Safety for Automotive"
C500 C501: library part GCM188R72A103KA37, "MLCC Automotive, 10nF, 0603, 100V, 10%, X7R", Case/Package=0603, Dielectric=X7R, Max Op# temp °C=125, Min Op# Temp °C=-55, Op Voltage=100V, Supplier Part Number=81-GCM188R72A103KA7D, Tolerance=10%, Datasheet URL=https://www.mouser.it/datasheet/2/281/1/GCM188R72A103KA37_01C-3144519.pdf, MFG1=MURATA, MPN1=GCM188R72A103KA37, Qualification=AEC-Q200, Supplier=Mouser, Supplier URL=https://www.mouser.it/ProductDetail/Murata-Electronics/GCM188R72A103KA37D?qs=aEuGZpxfbxXMjTExujWHsg%3D%3D, Technology="Powertrain/Safety for Automotive"
D200: library part RBR1L60ADDTE25, "Schottky Rectifier Diode 1A 60V SMA", Case/Package=SMA(DO-214AC), Max Op# temp °C=150, Min Op# Temp °C=-55, Supplier Part Number=755-RBR1L60ADDTE25, Datasheet URL=https://www.rohm.com/datasheet?p=RBR1L60ADD&dist=Mouser&media=referral&source=mouser.com&campaign=Mouser, If (A)=1A, MFG1=ROHM, MPN1=RBR1L60ADDTE25, Qualification=AEC-Q101, Supplier=Mouser, Supplier URL=https://www.mouser.it/it/ProductDetail/ROHM-Semiconductor/RBR1L60ADDTE25?qs=4v%252BiZTmLVHHPf04ac7QKmA%3D%3D, Vreverse=60V
D201: library part SM6T33CAY, "TVS Bidir 33V SMB", 8/20us Power=4KW, 10/1000us Power=0.6Kw, Case/Package=SMB/DO-214AA, Max Op# temp °C=150, Min Op# Temp °C=-55, Stand-Off Voltage=28.2V, Supplier Part Number=511-SM6T33CAY, MFG1=ST, MPN1=SM6T33CAY, Qualification=AEC-Q101, Supplier=Mouser, Supplier URL=https://www.mouser.it/ProductDetail/STMicroelectronics/SM6T33CAY?qs=94V4QatVK%252BdOInZlA3gJmA%3D%3D, Type=Bidirectional
D400: library part BAT54S, "Dual Schottky Diode,  Dual Series, SOT23, 0.2A, 30V", Case/Package="SOT323-3 (SC70)", MPN2=BAT54SLT1G, If (A)=0.2, MFG1=NEXPERIA, MFG2=OnSemi, MPN1=BAT54S, Type="Dual Series A1K2C", Vreverse=30V
D500 D501: library part SMA6T28AY, "TVS Uniir 28V SMA", 8/20us Power=4KW, 10/1000us Power=0.6Kw, Case/Package=SMA/DO-214AC, Max Op# temp °C=150, Min Op# Temp °C=-55, Stand-Off Voltage=24V, Supplier Part Number=511-SMA6T28AY, Datasheet URL=https://www.mouser.it/datasheet/2/389/sma6ty-1850088.pdf, MFG1=ST, MPN1=SMA6T28AY, Qualification=AEC-Q101, Supplier=Mouser, Supplier URL=https://www.mouser.it/ProductDetail/STMicroelectronics/SMAJ30A-TR?qs=zr%2F4QzOm779pW41kykOibw%3D%3D, Type=Unidirectional
DL200 DL402: library part SML-D12P8WT86C, "LED standard - SMD Grn 560nm 6.3mcd 2.2 V, 20mA, 0603 AECQ-102", Case/Package="0603-Top View", Color="Green 560nm", Max Current@ Tmax=4mA, Max Op# temp °C=100, Min Op# Temp °C=-40, Power Diss (mW)=54mW, Supplier Part Number=755-SML-D12P8WT86C, Datasheet URL=https://fscdn.rohm.com/en/products/databook/datasheet/opto/led/chip_mono/sml-d12p8wt86(c)-e.pdf, MFG1=ROHM, MPN1=SML-D12P8WT86C, Qualification=AEC-Q101, Supplier=Mouser, Supplier URL=https://www.mouser.it/ProductDetail/ROHM-Semiconductor/SML-D12P8WT86C?qs=HXFqYaX1Q2wFepzn1zWRrg%3D%3D, Technology=SM, Vf="2V @4mA"
DL400: library part SML-D12U8WT86C, "LED standard - SMD Red 620nm 63mcd 2.2 V, 20mA, 0603 AECQ-102", Case/Package="0603-Top View", Color="red 620nm", Max Current@ Tmax=4mA, Max Op# temp °C=100, Min Op# Temp °C=-40, Power Diss (mW)=54mW, Supplier Part Number=755-SML-D12U8WT86C, Datasheet URL=https://fscdn.rohm.com/en/products/databook/datasheet/opto/led/chip_mono/sml-d12u8wt86(c)-e.pdf, MFG1=ROHM, MPN1=SML-D12U8WT86C, Qualification=AEC-Q101, Supplier=Mouser, Supplier URL=https://www.mouser.it/ProductDetail/ROHM-Semiconductor/SML-D12U8WT86C?qs=HXFqYaX1Q2wNcb%2FPJz96zg%3D%3D, Technology=SM, Vf="2V @4mA"
DL401: library part "LY E63F-EAGA-36-1-50-R33", "LED monocolore Yellow Power TOPLED", Case/Package="PLCC4 3x3.4 h3.8mm", Color="Yellow 590nm", Max Current@ Tmax=50mA, Max Op# temp °C=100, Min Op# Temp °C=-40, Supplier Part Number=720-LYE63FA5935, Datasheet URL=https://dammedia.osram.info/media/resource/hires/osram-dam-7071545/LY%20E63F_EN.pdf, MFG1=OSRAM, MPN1="LY E63F-EAGA-36-1-50-R33", Qualification=AEC-Q102, Supplier=Mouser, Supplier URL=https://www.mouser.it/it/ProductDetail/ams-OSRAM/LY-E63F-EAGA-36-1?qs=vLWxofP3U2ym8HO6HoqADg%3D%3D, Technology=SM, Vf=1.85V@4mA
F200: library part 1206L016WR, "Resettable Fuse PPTC, 160mA Hold, 370mA Trip, 4.5R min, 30V", Case/Package=1206, Hold Current=160mA, Max Op# temp °C=125°, Max Resistance=4.5, Min Op# Temp °C=-40, Supplier Part Number=576-1206L016WR, Trip Current=370mA, Datasheet URL=https://www.littelfuse.com/assetdocs/resettable-ptcs-1206l-datasheet?assetguid=2B6A1515-D4EE-4C83-8BD4-152B4901B8F5, MFG1=LITTLEFUSE, MPN1=1206L016WR, Supplier=Mouser, Supplier URL=https://www.mouser.it/it/ProductDetail/Littelfuse/1206L016WR?qs=PWhpLWeW8weybSDHdny44Q%3D%3D, Technology=SMD
F500 F501: library part MICROSMD010F-2, "Resettable Fuse PPTC, 100mA Hold, 250mA Trip, 2.1R min, 30V", Case/Package=1210, Hold Current=100mA, Max Op# temp °C=85°, Max Resistance=2.1, Min Op# Temp °C=-40, Supplier Part Number=650-MICROSMD010F-2, Trip Current=250mA, Datasheet URL=https://www.littelfuse.com/assetdocs/littelfuse-ptc-microsmd-datasheet?assetguid=9831a125-bc6a-4727-872e-aa92d8395030, MFG1=LITTLEFUSE, MPN1=MICROSMD010F-2, Supplier=Mouser, Supplier URL=https://www.mouser.it/it/ProductDetail/Littelfuse/MICROSMD010F-2?qs=RMiEzKrVl1c3GmCbTUJbRQ%3D%3D, Technology=SMD
FB300 FB400 FB401: library part BLM18HE601SH1D, "SMD EMI Suppression Ferrite Bead 600R, 0603, For DC Power", Case/Package=0603, Max Op# temp °C=125, Min Op# Temp °C=-55, Rated Current @85°C=0.8A, Rated Current @125°C=0.6A, Supplier Part Number=81-BLM18HE601SH1D, Datasheet URL=https://www.murata.com/products/productdata/8796199452702/QNFA9104.pdf?1539737628000, DCR (mR)=125, Impedence @1GHz=600R, Impedence @100MHz=600R, MFG1=MURATA, MPN1=BLM18HE601SH1D, Supplier=Mouser, Supplier URL=https://www.mouser.it/ProductDetail/Murata-Electronics/BLM18HE601SH1D?qs=d0WKAl%252BL4KZJDOgHon8ecQ%3D%3D, Technology=AEC-Q200
L200: library part 74438333033, "Power Inductors - SMD WE-MAPI 3,3uH 1.1A DCR=266mOhms AECQ200", Case/Package=1212, Max Op# temp °C=125, Min Op# Temp °C=-40, Rated Current (mA)=1.85, Rated Voltage=80, Sat Current (mA)=2.05, Supplier Part Number=710-74438333033, Datasheet URL=https://www.we-online.com/components/products/datasheet/74438333033.pdf, DCR (mR)=266mOhm, Fres (MHz)=38, MFG1=WE, MPN1=74438333033, Qualification=AEC-Q200, Supplier=Mouser, Supplier URL=https://www.mouser.it/it/ProductDetail/Wurth-Elektronik/74438333033?qs=ZB8tH5z5N7YH5nN%252BUBdrEg%3D%3D, Technology=SMD
L201: library part 744032004, "EMI Filtering Inductor WE-LQ SMT, 4.7uH, 490mA,", Case/Package=1210, Max Op# temp °C=125, Min Op# Temp °C=-40, Rated Current (mA)=490, Sat Current (mA)=1250, Supplier Part Number=710-744032004, Datasheet URL=https://www.we-online.com/components/products/datasheet/744032004.pdf, DCR (mR)=280mOhm, MFG1=WE, MPN1=744032004, Supplier=Mouser, Supplier URL=https://www.mouser.it/it/ProductDetail/Wurth-Elektronik/744032004?qs=XJfXErqHgA4qekdNbV2MtQ%3D%3D, Technology=SMD
Q500 Q501: library part NEXPERIA, "NPN general purpose transistors", Case/Package=SOT23-3, Max Op# temp °C=150, Min Op# Temp °C=-65, MPN1=BC847C-QR, MPN2=BC847C-Q, Power Diss (mW)=250, Supplier Part Number=771-BC847C-QR, Hfe (min)=520, Ic (mA)=100, Manufacturer URL=https://www.nexperia.com/search?q=BC847C-Q&searchCategory=, MFG1=NEXPERIA, MFG2=Diodes, Qualification=AEC-Q101, Supplier=Mouser, Supplier URL=https://www.mouser.it/ProductDetail/Nexperia/BC847C-QR?qs=e8oIoAS2J1RqA3Lgar2wrA%3D%3D, Type=NPN, Vce Max (V)=45
R200 R400 R401 R402: library part CRCW040210K0FKED, "Thick Film SM Chip Resistors, 10K, 0402, ±1%, 1/10W", Case/Package=0402, Max Op# temp °C=155, Min Op# Temp °C=-55, Power=63mW, Supplier Part Number=71-CRCW0402-10K-E3, Temp# Coeffiient (PPM/C)=100, Tolerance=1%, MFG1=VISHAY, MPN1=CRCW040210K0FKED, Qualification=AEC-Q200, Supplier=Mouser, Supplier URL=https://www.mouser.it/ProductDetail/Vishay-Dale/CRCW040210K0FKED?qs=rlE3Te1NifyN3e8vvxacSw%3D%3D, Technology="Thick Film"
R201 R403 R404 R405: library part TNPW0402249RBYEP, "Thick Film SM Chip Resistors, 249R, 0402, ±0.1%, 10ppm 1/16W", Case/Package=0402, Max Op# temp °C=155, Min Op# Temp °C=-55, Power=63mW, Supplier Part Number=71-TNPW0402249RBYEP, Temp# Coeffiient (PPM/C)=10, Tolerance=0,1%, MFG1=VISHAY, MPN1=TNPW0402249RBYEP, Qualification=AEC-Q200, Supplier=Mouser, Supplier URL=https://www.mouser.it/ProductDetail/Vishay-Dale/TNPW0402249RBYEP?qs=iLbezkQI%252Bsgmf6IA3nvojA%3D%3D, Technology="Thick Film"
R300 R302 R304 R305: library part CRCW04020000Z0ED, "Thick Film SM Chip Resistors, 0R, 0402, 1/16W", Case/Package=0402, Max Op# temp °C=155, Min Op# Temp °C=-55, Power=63mW, Supplier Part Number=71-CRCW0402-0-E3, Temp# Coeffiient (PPM/C)=0, Tolerance=0%, Datasheet URL=https://www.vishay.com/docs/20035/dcrcwe3.pdf, MFG1=VISHAY, MPN1=CRCW04020000Z0ED, Qualification=AEC-Q200, Supplier=Mouser, Supplier URL=https://www.mouser.it/ProductDetail/Vishay-Dale/CRCW04020000Z0ED?qs=OlqPY1Ciranv3qgeAHCodg%3D%3D, Technology="Thick Film"
R301 R303 R306 R307: library part CRCW0402100RFKED, "Thick Film SM Chip Resistors, 100R, 0402, ±1%, 1/16W", Case/Package=0402, Max Op# temp °C=155, Min Op# Temp °C=-55, Power=63mW, Supplier Part Number=71-CRCW0402-100-E3, Temp# Coeffiient (PPM/C)=100, Tolerance=1%, Datasheet URL=https://www.vishay.com/docs/20035/dcrcwe3.pdf, MFG1=VISHAY, MPN1=CRCW0402100RFKED, Qualification=AEC-Q200, Supplier=Mouser, Supplier URL=https://www.mouser.it/ProductDetail/Vishay-Dale/CRCW0402100RFKED?qs=OlqPY1CiralT1EG%2F62gJpQ%3D%3D, Technology="Thick Film"
R308 R309: library part CRCW04021K00FKED, "Thick Film SM Chip Resistors, 1K, 0402, ±1%, 1/16W", Case/Package=0402, Max Op# temp °C=155, Min Op# Temp °C=-55, Power=63mW, Supplier Part Number=71-CRCW0402-1.0K-E3, Temp# Coeffiient (PPM/C)=100, Tolerance=1%, MFG1=VISHAY, MPN1=CRCW04021K00FKED, Qualification=AEC-Q200, Supplier=Mouser, Supplier URL=https://www.mouser.it/ProductDetail/Vishay-Dale/CRCW04021K00FKED?qs=YX%252BK5oaHNYqQ2WK%252BIAW12A%3D%3D, Technology="Thick Film"
R406: library part CRCW060333K0FKEA, "Thick Film SM Chip Resistors, 33K, 0603, ±1%, 1/10W", Case/Package=0603, Max Op# temp °C=155, Min Op# Temp °C=-55, Power=100mW, Supplier Part Number=71-CRCW0603-33K-E3, Temp# Coeffiient (PPM/C)=100, Tolerance=1%, MFG1=VISHAY, MPN1=CRCW060333K0FKEA, Qualification=AEC-Q200, Supplier=Mouser, Supplier URL=https://www.mouser.it/ProductDetail/Vishay-Dale/CRCW060333K0FKEA?qs=lRdAfIXKPc%2FlOd6gcmC8oQ%3D%3D, Technology="Thick Film"
R407: library part CRCW06033K30FKEA, "Thick Film SM Chip Resistors, 3K3, 0603, ±1%, 1/10W", Case/Package=0603, Max Op# temp °C=155, Min Op# Temp °C=-55, Power=100mW, Supplier Part Number=71-CRCW0603-3.3K-E3, Temp# Coeffiient (PPM/C)=100, Tolerance=1%, MFG1=VISHAY, MPN1=CRCW06033K30FKEA, Qualification=AEC-Q200, Supplier=Mouser, Supplier URL=https://www.mouser.it/ProductDetail/Vishay-Dale/CRCW06033K30FKEA?qs=1ghF3ZI8kS8fRqapjAj84Q%3D%3D&gad_source=1&gclid=EAIaIQobChMI4J_M0IWohAMVrUNBAh1qNACkEAAYBCAAEgIV-vD_BwE, Technology="Thick Film"
R500 R501: library part ERJ-UP6D1001V, "Thick Film SM Chip Resistors, 1K, 0805, ±0.5%, 1/2W", Case/Package=0805, Max Op# temp °C=155, Min Op# Temp °C=-55, Power=500mW, Supplier Part Number=667-ERJ-UP6D1001V, Temp# Coeffiient (PPM/C)=100, Tolerance=0.5%, Datasheet URL=https://www.mouser.com/catalog/specsheets/Panasonic_03-31-2024_Resistor_Anti-Sulfur(ERJ-UP6D-Series).pdf?_gl=1*1e8nwi8*_gcl_aw*R0NMLjE3Njc5NTQ2NTkuQ2p3S0NBaUE2NExMQmhCaEVpd0EtUHhndXhkNEYtbVB4TUc1OThEMlhWWVZvVEZGVXVGM1djYmUtdlk1a3VMZFRfZGNHclBMelhFSjRSb0NH, MFG1=PANASONIC, MPN1=ERJ-UP6D1001V, Qualification=AEC-Q200, Supplier=Mouser, Supplier URL=https://www.mouser.it/ProductDetail/Panasonic/ERJ-UP6D1001V?qs=sGAEpiMZZMvdGkrng054t2cqbZCzJY7NErLgAwiDoTXwln0CjOTO8w%3D%3D, Technology="Thick Film"
TB400: library part FTSH-103-01-L-DV, "Samtech FTSH Header, 6pin (3x2), pitch 1.27mm, for Arm Jtag", Case/Package=SMD-6, Max Op# temp °C=125, Min Op# Temp °C=-55, Supplier Part Number=200-FTSH10301LDV, Datasheet URL=https://www.mouser.it/datasheet/3/85/1/ftsh_smt.pdf, MFG1=Samtec, Mount=SMD, MPN1=FTSH-103-01-L-DV, Orientation=Vertical, Pins=6, Pitch=1.27, Supplier=Mouser, Supplier URL=https://www.mouser.it/it/ProductDetail/Samtec/FTSH-103-01-L-DV?qs=WqbWUrltBn0517uOVN%2FZKw%3D%3D
TP100 TP101 TP102 TP103: library part TP_RECT_2x6, "Test Point rect 2x5mm", Case/Package=SMD, ConnType=TestProbe, Mount=SMD, MPN1=TP_RECT_2x6, Orientation=-, Pins=1
U200: library part NCV890430MW50TXG, "synchronous buck converter; 3.5-37Vin; 5Vout; 600mA", Case/Package=DFN-8, Frequency="2MHz / 1MHz", Max Input Voltage=37V, Max Op# temp °C=150°C, Max Ouput Current=600mA, Min Input Voltage=3.5V, Min Op# Temp °C=-40°C, Nominal Output Voltage=5V, Op Voltage=3.5-37V, Supplier Part Number=863-NCV890430MW50TXG, ComponentType="DCDC converter", Datasheet URL=https://www.onsemi.com/download/data-sheet/pdf/ncv890430-d.pdf, Max Duty Cycle=1, Max Supply Voltage (DC)=37V, MFG1=OnSemi, Min Supply Voltage=3.5V, MPN1=NCV890430MW50TXG, Qualification=AEC-Q100, Supplier=Mouser, Supplier URL=https://www.mouser.it/it/ProductDetail/onsemi/NCV890430MW50TXG?qs=OycAS1CGnlh8h8gdwAjytg%3D%3D, Switching Frequency="2MHz / 1MHz"
U201: library part TPS78433QWDRBRQ1, "TPS784-Q1 Automotive, 3.3V, 300mA, High-PSRR LDO", Case/Package="WSON-8 3x3", Max Op# temp °C=150, Min Op# Temp °C=-40, Out Voltage Accuracy=0.5%, Supplier Part Number=595-TPS78433QWDRBRQ1, Datasheet URL=https://www.ti.com/lit/gpn/tps784-q1, Dropout @ Imax (V)=0.08, Imax (mA)=300mA, MFG1=TI, MPN1=TPS78433QWDRBRQ1, Output Type=3.3V, Qualification=AEC-Q100, Quiescent cuttent(uA)=25, Supplier=Mouser, Supplier URL=https://www.mouser.it/ProductDetail/Texas-Instruments/TPS78433QWDRBRQ1?qs=iLbezkQI%252BsgJRXPFYNHjvQ%3D%3D, Vin Max (V)=6V, Vin Min (V)=1.7
U300: "IPS interface IC", Case/Package=TSSOP-16, Manufacturer_Name="Texas Instruments", Max Op# temp °C=160, Min Op# Temp °C=-40, Supplier Part Number=595-LDC5072EPWRQ1, Copyright="Copyright (C) 2026 Ultra Librarian. All rights reserved.", Datasheet URL=https://www.ti.com/lit/ds/symlink/ldc5072-q1.pdf?ts=1784869376494&ref_url=https%253A%252F%252Fwww.ti.com%252Fproduct%252FLDC5072-Q1, Manufacturer_Part_Number=LDC5072EPWRQ1, MFG1=TI, MPN1=LDC5072EPWRQ1, Qualification=AEC-Q100, RefDes=RefDes, Supplier=Mouser, Supplier URL=https://www.mouser.it/it/ProductDetail/Texas-Instruments/LDC5072EPWRQ1?qs=GBLSl2AkiruyHDEJhswGzQ%3D%3D, Type="Specialized Sensors"
U400: "MCU  Arm Cortex-M4 MCU 170 MHz -64 KB Flash", Case/Package=QFN32, Manufacturer_Name=STMicroelectronics, Mouser Part Number=511-STM32G431K8U6, Datasheet Link=https://www.st.com/resource/en/datasheet/stm32g431c6.pdf, Geometry.Height=0.6mm, Manufacturer_Part_Number=STM32G431K8U6, MFG1=STMicroelectronics, Mouser Price/Stock=https://www.mouser.co.uk/ProductDetail/STMicroelectronics/STM32G431K8U6?qs=sPbYRqrBIVmxpguskjGNNg%3D%3D, MPN1=STM32G431K8U6

## Via types
v1: diameter 0.6, hole 0.3, Mid-Layer 2 to Bottom Layer, tented both sides, 66 vias
v2: diameter 0.6, hole 0.3, Top Layer to Mid-Layer 1, tented both sides, 54 vias
v3: diameter 0.8, hole 0.4, Top Layer to Bottom Layer, tented both sides, 6 vias
v4: diameter 0.8, hole 0.4, Top Layer to Mid-Layer 1, tented both sides, 4 vias
v5: diameter 0.5, hole 0.25, Mid-Layer 2 to Bottom Layer, tented both sides, 1 vias
v6: diameter 0.6, hole 0.3, Top Layer to Mid-Layer 1, 1 vias

## Nets (pads, with @x,y where several pads share a name; then routed paths per layer and width w, separated by ;. In a path a pad name is that pad's centre, name@x,y a point inside that pad or via, vN(x,y) a via of type N, cw(c..) or ccw(c..) an arc to the next point about the centre after c; other vN are vias at no path point)
3V3: C207.1 D400.2 FB300.1 FB400.1 R201.2 U201.1 | length 70.5
  Top Layer w0.2: 14.297,17.027 v2(14.9,16.7) 15.4,16.4 15.985,16.4 R201.2@16.025,16.36 ; U201.1@14.645,17.629 U201.1@14.818,17.529 ; D400.2@16.423,22.679 16.538,22.429 v2(17.8,21.7) ; FB400.1@25.586,-17.135 25.934,-17.289 FB400.1@25.979,-17.319
  Top Layer w0.4: C207.1@13.8,16.165 13.726,15.977 13.395,15.403 ; C207.1@13.95,16.425 14.297,17.027 U201.1@14.645,17.629 ; FB300.1@17.579,8.44 17.489,8.625 ccw(c0.824,0.396) 13.147,14.309 cw(c13.423,14.62) 13.064,14.83 13.395,15.403 ; FB400.1@25.979,-17.319 ccw(c26.09,-17.153) 26.214,-17.31 26.654,-16.961 ccw(c0,0) 27.3,15.9 24.44,16.097 ccw(c24.412,15.698) 24.361,16.095 14.538,14.818 cw(c14.486,15.215) 14.281,14.871 13.395,15.403
  Mid-Layer 1 w0.2: v2(14.9,16.7) v2(17.8,21.7)
3V3_LDC: C300.1 C301.1 C302.1 FB300.2 R308.2 U300.14 U300.16 | length 25.4
  Top Layer w0.3: FB300.2@17.827,7.162 18.161,7.147 18.62,7.238 ; v2(18,12.2) 18,10.429 ccw(c18.3,10.429) 18.006,10.372 18.62,7.238 ; U300.14@19.365,2.858 19.911,2.939 21.8,3.2 ; 19.777,6.649 cw(c19.732,6.945) 19.438,6.887 19.372,7.219 C302.1@19.327,7.362 19.078,7.329 18.62,7.238 ; 19.778,6.649 21.09,6.851 cw(c21.136,6.555) 21.434,6.588 21.769,3.489 21.802,3.2 21.967,1.786 cw(c21.669,1.751) 21.716,1.455 20.098,1.2 ; U300.16@20,1.6 20.098,1.2 ; C300.1@20.59,-0.802 20.279,0.464 20.277,0.473 20.098,1.2 ; R308.2@21.209,13.112 21.254,13.067 21.254,12.246 v2(21.3,12.2)
  Mid-Layer 1 w0.3: v2(18,12.2) v2(21.3,12.2)
3V3_MCU: C402.1 C403.1 FB400.2 FB401.1 R400.2 R401.2 TB400.1 U400.1 U400.17 | length 35.6
  Top Layer w0.2: C402.1@15.075,-14.875 C402.1@15.1,-14.9 ; U400.17@16.655,-14.932 U400.17@16.829,-14.757 ; v2(24.146,-17.812) 26.859,-13.511 27.165,-13.054 R401.2@27.248,-12.9
  Top Layer w0.3: TB400.1@14.936,-16.967 14.508,-16.545 v2(15.1,-15.7) C402.1@15.1,-14.9 ; C402.1@15.132,-14.932 U400.17@16.655,-14.932 ; U400.1@22.49,-12.775 22.49,-12.767 22.757,-12.5 23.4,-12.5 ; FB401.1@23.14,-19.061 23.467,-18.828 v2(24.146,-17.812) ; R400.2@23.625,-17.474 23.775,-17.564 v2(24.146,-17.812) ; C403.1@24.5,-12.5 23.4,-12.5 ; v2(24.5,-11.6) 23.617,-11.6 23.5,-11.717 23.5,-12.4 23.4,-12.5 ; FB400.2@24.864,-18.215 24.517,-18.06 v2(24.146,-17.812)
  Mid-Layer 1 w0.3: v2(15.1,-15.7) 20.176,-18.953 ccw(c20.338,-18.7) 20.338,-19 22.873,-19 ccw(c22.873,-18.7) 23.088,-18.908 v2(24.146,-17.812) 26.618,-13.482 ccw(c26.357,-13.334) 26.535,-13.092 ; v2(24.5,-11.6) 26.534,-13.092
5V: C204.1 C205.1 C206.1 C208.1 L200.2 U200.5 U201.7 U201.8 | length 23.6
  Top Layer w0.2: U200.5@6.565,26.278 6.881,26.149 11.16,24.02 ; U201.8@12.25,19.081 U201.8@12.28,19.133 ; U201.7@12.545,19.592 U201.7@12.575,19.644
  Top Layer w0.4: L200.2@10.422,28.652 11.865,28.586 12.8,28.3 11.6,24.9 11.16,24.02 9.7,21.1 11.129,20.376 U201.7@12.575,19.644 ; U201.8@12.28,19.133 U201.7@12.545,19.592
  Top Layer w0.5: C208.1@5.07,30.873 6.272,30.635 7.459,30.39 8.375,30.2 C204.1@7.474,30.398
AGC_EN: R308.1 R309.2 U300.8 | length 13.7
  Top Layer w0.2: R309.2@21.816,14.563 21.868,14.395 22.054,13.459 R308.1@22.091,13.288 22.125,13.116 22.285,12.315 22.475,12.125 26.575,12.125 26.634,12.066 27.1,11.6 27.1,8.7 26.9,8.5 25.931,8.324 ccw(c25.966,8.127) 25.771,8.171 ; U300.8@24.517,7.196 25.11,7.303 25.472,7.375 ; 25.473,7.375 ccw(c25.433,7.571) 25.628,7.527 25.771,8.17